# EAGLE board throughhole (EAGLE 8.7.1)
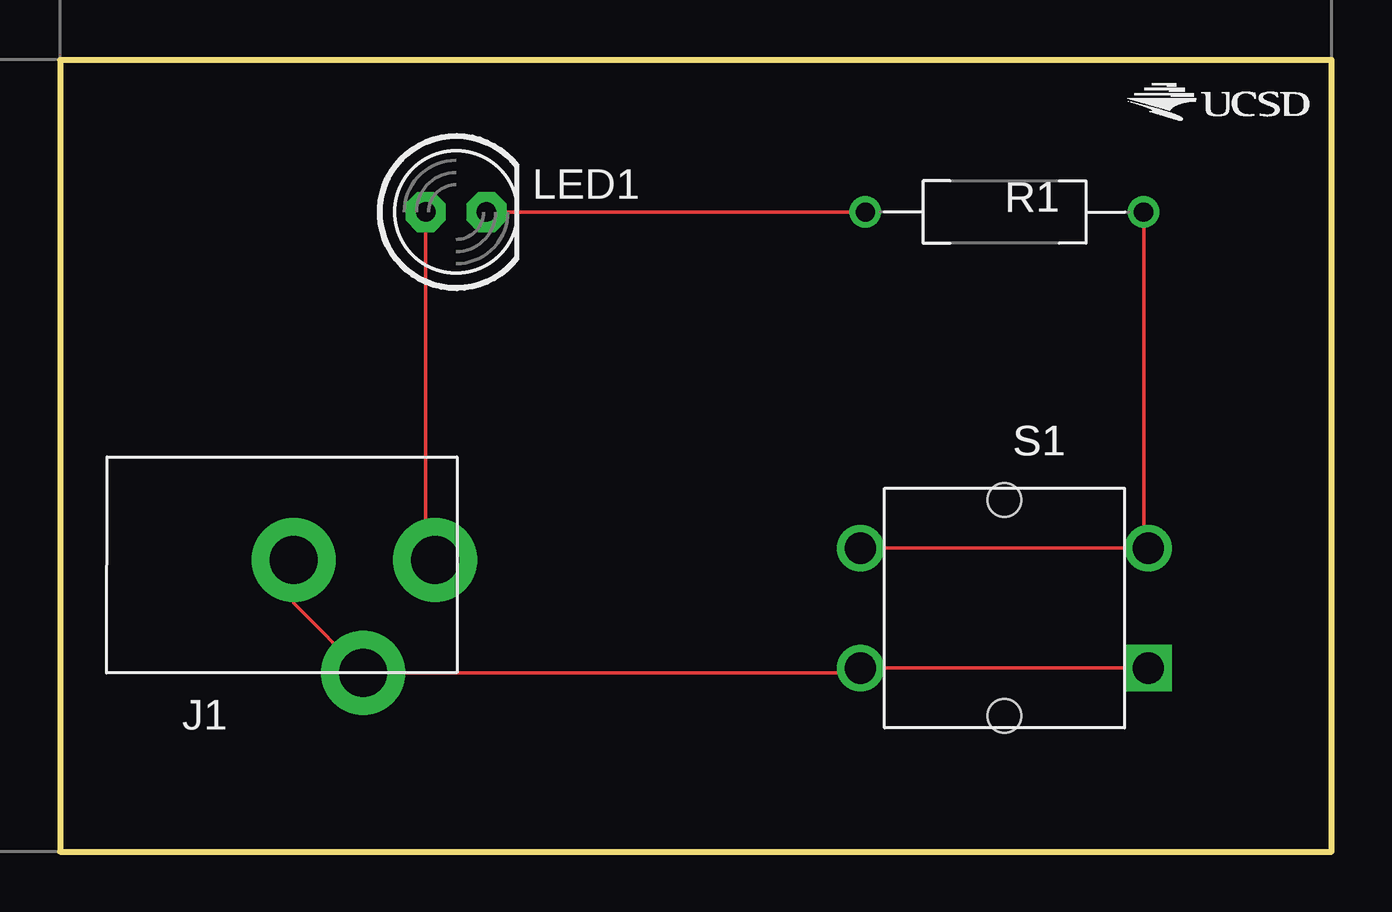
[diagram p0: board, top side]

Size 53.01 x 33.01 mm. Coordinates in mm from the lower left corner, seen from the top.
Outline: 0,0 53.01,0 53.01,33.01 0,33.01 0,0
Copper layers (1*16): Top 0.035mm / dielectric 1.5mm / Bottom 0.035mm
Design rules "default": minimum track width 6mil, minimum drill 0.35mm, track to track 6mil, track to pad 6mil, pad to pad 6mil, via to via 6mil, smd to smd 6mil, copper to edge 40mil, drill to drill 6mil, minimum pad ring 10mil, minimum via ring 8mil, stop-mask expansion 4mil, vias tented up to drill 0mil, thermal gap 10mil

## Footprints (pad centres in the part's own frame; a part is rotated, then mirrored left to right if it is on the bottom)
PJ-102A = drill 2 pad 3.5: RING -6.77,-4.345; RING_SW -3.87,-9.045; TIP -0.87,-4.345
LED5MM = drill 0.813 pad 1.676 octagon: A -1.27,0; K 1.27,0
RESAD1160W55L680D260_HS = drill 0.8 pad 1.2: 1 -5.8,0; 2 5.8,0
BUTTON-TACTILE-SQUARE-ADAFRUIT1010 = drill 1.3 square: P -6,2.5 | drill 1.3: P2 6,2.5; S -6,-2.5; S2 6,-2.5 | hole 1.4: 0,-4.5; 0,4.5

## Placement (x,y rotation side)
J1  2.1MMJACKTHM  [PJ-102A]  16.51,16.51 0 top
LED1  RED  [LED5MM]  16.51,26.67 0 top
R1  330Ohms  [RESAD1160W55L680D260_HS]  39.37,26.67 0 top
S1  BUTTON-TACTILE-SQUARE  [BUTTON-TACTILE-SQUARE-ADAFRUIT1010]  39.37,10.16 180 top
U$1  [UCSD_LOGO]  44.45,30.48 0 top

## Library data of the parts
J1 = Lab01; CREATOR: Swanson; DIST: Digikey; DISTPN: CP-102A-ND; REVIEWER: Swanson
LED1 = Lab01; CREATOR: Swanson; DIST: Adafruit; DISTPN: 297; REVIEWER: Swanson
R1 = Lab01; CREATOR: Swanson; DIST: Digikey; DISTPN: 100QTR-ND; REVIEWER: Swanson
S1 = Lab01; CREATOR: Swanson; DIST: Adafruit; DISTPN: 1010; REVIEWER: Swanson
U$1 = Logos

## Nets
N$1: J1.TIP LED1.A
N$2: LED1.K R1.1
N$3: R1.2 S1.S S1.S2
N$4: J1.RING J1.RING_SW S1.P S1.P2

## Tracks (layer width: path | path; a pad name or v marks a point on that pad's centre or on a via)
N$1
  Top 0.152: J1.TIP 15.24,12.56 LED1.A
N$2
  Top 0.152: LED1.K R1.1
N$3
  Top 0.152: R1.2 45.17,12.86 S1.S S1.S2
N$4
  Top 0.152: S1.P S1.P2 33.17,7.46 J1.RING_SW 9.74,10.37 J1.RING